# EAGLE board team throttle control draft 2 (EAGLE 9.6.2)
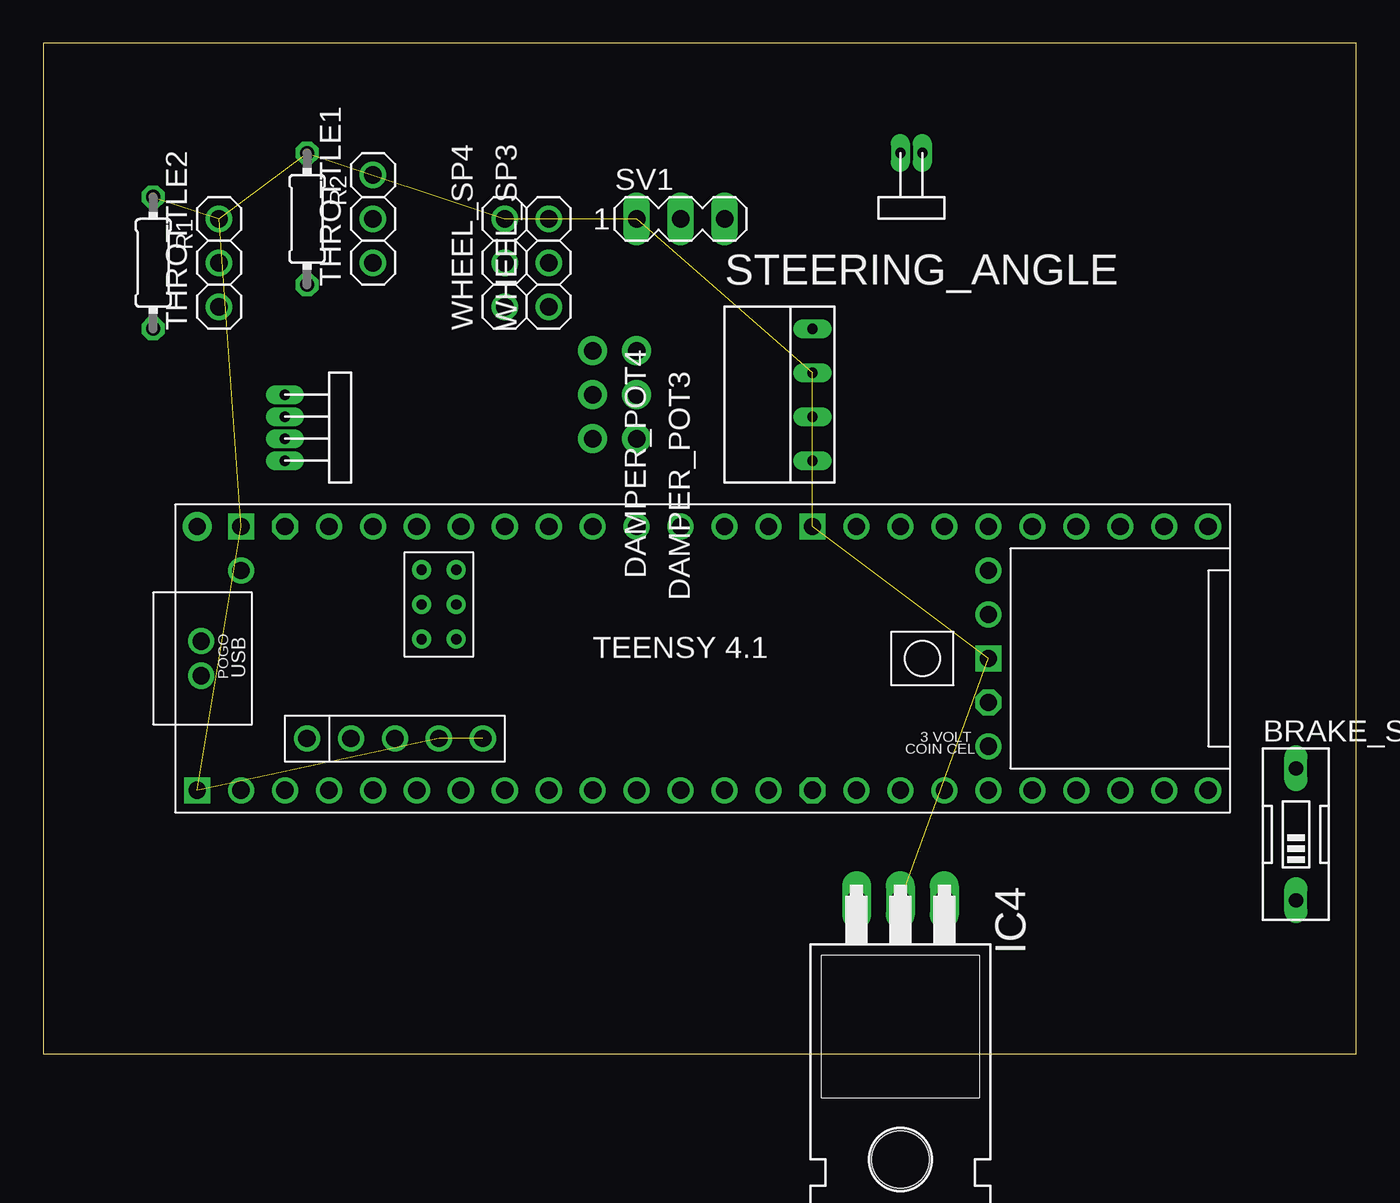
[diagram p0: board, top side]
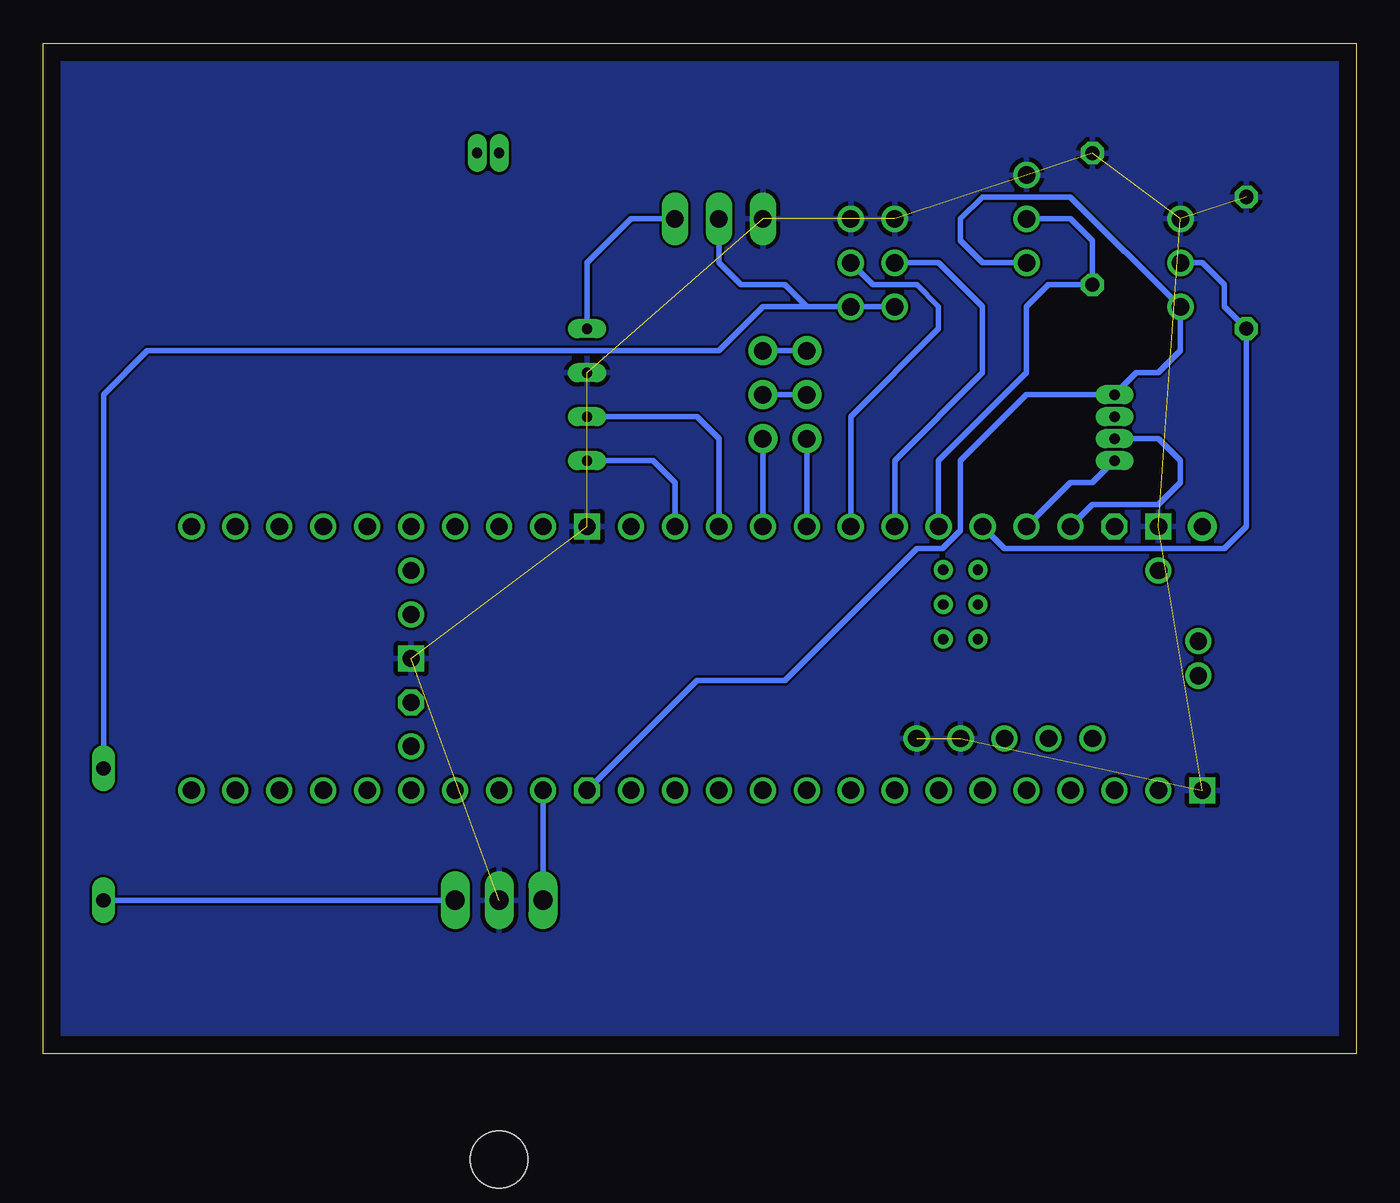
[diagram p1: board, bottom side, seen from below]

Size 75.87 x 58.41 mm. Coordinates in mm from the lower left corner, seen from the top.
Outline: 0,0 75.87,0 75.87,58.41 0,58.41 0,0
Copper layers (1*16): Top 0.035mm / dielectric 1.5mm / Bottom 0.035mm
Design rules "default": minimum track width 6mil, minimum drill 0.35mm, track to track 6mil, track to pad 6mil, pad to pad 6mil, via to via 6mil, smd to smd 6mil, copper to edge 40mil, drill to drill 6mil, minimum pad ring 10mil, minimum via ring 8mil, stop-mask expansion 4mil, vias tented up to drill 0mil, thermal gap 10mil

## Footprints (pad centres in the part's own frame; a part is rotated, then mirrored left to right if it is on the bottom)
EDG-01 = drill 0.813 long: 1 0,-3.81; 2 0,3.81
1X03-CLEANBIG = drill 1.016 pad 1.676: 1 -2.54,0; 2 0,0; 3 2.54,0
TO220H = drill 1.118 long: 1 -2.54,-10.16; 2 0,-10.16; 3 2.54,-10.16 | hole 3.302: 0,4.826
0204/7 = drill 0.813 octagon: 1 -3.81,0; 2 3.81,0
ROTARY_ENCODER = drill 0.6 long: GND 1.27,1.27; PH_A 1.27,-3.81; PH_B 1.27,-1.27; VCC 1.27,3.81
MA03-1 = drill 1.016 long: 1 -2.54,0; 2 0,0; 3 2.54,0
1X03 = drill 1.016: 1 -2.54,0; 2 0,0; 3 2.54,0
TEENSY41 = drill 1: 0-RX1/CS1/CRX2 -27.94,-7.62; 1-TX1/MISO1/CTX2 -25.4,-7.62; 2-OUT2 -22.86,-7.62; 3-LRCLK2 -20.32,-7.62; 4-BCLK2 -17.78,-7.62; 5-IN2 -15.24,-7.62; 6-OUT1D -12.7,-7.62; 7-RX2/OUT1A -10.16,-7.62; 8-TX2/IN2 -7.62,-7.62; 9-OUT1C -5.08,-7.62; 10-CS\MQSR -2.54,-7.62; 11-MOSI/CTX1 0,-7.62; 12-MISO/MQSL 2.54,-7.62; 13-SCK/LED 2.54,7.62; 14-A0/TX3/SPDIF_OUT 0,7.62; 15-A1/RX3/SPDIF_IN -2.54,7.62; 16-A2/RX4/SCL1 -5.08,7.62; 17-A3/TX4/SDA1 -7.62,7.62; 18-A4/SDA0 -10.16,7.62; 19-A5/SCL0 -12.7,7.62; 20-A6/TX5/LRCLK1 -15.24,7.62; 21-A7/RX5/BCLK1 -17.78,7.62; 22-A8/CTX1 -20.32,7.62; 23-A9/CRX1/MCLK1 -22.86,7.62; 24-A10/TX6/SCL2 7.62,-7.62; 25-A11/RX6/SDA2 10.16,-7.62; 26-A12/MOSI1 12.7,-7.62; 27-A13/SCK1 15.24,-7.62; 28-RX7 17.78,-7.62; 29-TX7 20.32,-7.62; 30-CRX3 22.86,-7.62; 31-CTX3 25.4,-7.62; 32-OUT1B 27.94,-7.62; 33-MCLK2 27.94,7.62; 34-RX8 25.4,7.62; 35-TX8 22.86,7.62; 36-PWM 20.32,7.62; 37-PWM 17.78,7.62; 38-A14/CS/IN1 15.24,7.62; 39-A15/CS/OUT1A 12.7,7.62; 40-A16/CS1 10.16,7.62; 41-A17/MISO1 7.62,7.62; +5V -24.13,-4.62; D+ -30.25,-1; D- -30.25,1; DM -21.59,-4.62; DP -19.05,-4.62; GND4 -16.51,-4.62; GND5 -13.97,-4.62; ON/OFF 15.24,5.08; PROGRAM 15.24,2.54; VBAT 15.24,-5.08; VUSB -27.94,5.08 | drill 1 octagon: 3V3-1 5.08,-7.62; 3V3-2 15.24,-2.54; 3V3-3 -25.4,7.62 | drill 0.6: G -15.51,3.12; LED -17.51,3.12; R+ -17.51,5.12; R- -15.51,5.12; T+ -15.51,1.12; T- -17.51,1.12 | drill 1 square: GND1 -30.48,-7.62; GND2 15.24,0; GND3 5.08,7.62; GND6 -27.94,7.62 | drill 1 pad 1.676: VIN -30.48,7.62
CAN_BUS = drill 0.6 long: P$2 3.81,2.54; P$3 5.08,2.54
CAN_TEN = drill 0.6 long: P$1 2.54,1.27; P$2 3.81,1.27; P$3 5.08,1.27; P$4 6.35,1.27

## Placement (x,y rotation side)
BRAKE_SW  [EDG-01]  72.39,12.7 0 top
DAMPER_POT3  [1X03-CLEANBIG]  34.29,38.1 270 top
DAMPER_POT4  [1X03-CLEANBIG]  31.75,38.1 270 top
IC4  7805T  [TO220H]  49.53,-1.27 180 top
R1  47k  [0204/7]  6.35,45.72 270 top
R2  470k  [0204/7]  15.24,48.26 270 top
STEERING_ANGLE  ROTARY_ENCODER  [ROTARY_ENCODER]  43.18,38.1 0 top
SV1  [MA03-1]  36.83,48.26 0 top
THROTTLE1  [1X03]  19.05,48.26 90 top
THROTTLE2  [1X03]  10.16,45.72 90 top
U$3  TEENSY41  [TEENSY41]  39.37,22.86 0 top
U$10  CAN_BUS  [CAN_BUS]  54.61,54.61 180 top
U$11  CAN_TEE  [CAN_TEN]  12.7,40.64 270 top
WHEEL_SP3  [1X03]  29.21,45.72 90 top
WHEEL_SP4  [1X03]  26.67,45.72 90 top

## Library data of the parts
BRAKE_SW = special
DAMPER_POT3 DAMPER_POT4 IC4 THROTTLE1 THROTTLE2 WHEEL_SP3 WHEEL_SP4 = adafruit
R1 R2 = rcl; SPICEPREFIX: R
STEERING_ANGLE U$10 U$11 = F-E library custom components
SV1 = con-lstb; OC_FARNELL: unknown; OC_NEWARK: unknown
U$3 = teensy

## Nets
3.3V: THROTTLE1.1 THROTTLE2.1 U$3.3V3-1 U$11.P$1
5V: STEERING_ANGLE.VCC SV1.3
12V: BRAKE_SW.2 SV1.2 WHEEL_SP3.1 WHEEL_SP4.1
A2_2: DAMPER_POT3.3 U$3.16-A2/RX4/SCL1
A3_2: DAMPER_POT4.3 U$3.17-A3/TX4/SDA1
ACC_DATA_OUT_1: R2.2 THROTTLE1.2 U$3.20-A6/TX5/LRCLK1
ACC_DATA_OUT_2: R1.2 THROTTLE2.2 U$3.21-A7/RX5/BCLK1
BL_GND: DAMPER_POT3.2 DAMPER_POT4.2
BR_SW: IC4.3 U$3.24-A10/TX6/SCL2
BR_VCC: DAMPER_POT3.1 DAMPER_POT4.1
CRX_2: U$3.23-A9/CRX1/MCLK1 U$11.P$3
CTX_2: U$3.22-A8/CTX1 U$11.P$4
GND: IC4.2 R1.1 R2.1 STEERING_ANGLE.GND SV1.1 THROTTLE1.3 THROTTLE2.3 U$3.GND1 U$3.GND2 U$3.GND3 U$3.GND4 U$3.GND5 U$3.GND6 WHEEL_SP3.3 WHEEL_SP4.3
GND\: U$11.P$2
N$4: BRAKE_SW.1 IC4.1
T2_DP_1: STEERING_ANGLE.PH_A U$3.14-A0/TX3/SPDIF_OUT
T2_DP_2: STEERING_ANGLE.PH_B U$3.15-A1/RX3/SPDIF_IN
WH_SP3_D: U$3.18-A4/SDA0 WHEEL_SP3.2
WH_SP4_D: U$3.19-A5/SCL0 WHEEL_SP4.2

## Tracks (layer width: path | path; a pad name or v marks a point on that pad's centre or on a via)
3.3V
  Bottom 0.305: THROTTLE1.1 21.59,45.72 22.86,46.99 22.86,48.26 21.59,49.53 16.51,49.53 THROTTLE2.1 10.16,40.64 11.43,39.37 12.7,39.37 U$11.P$1 19.05,38.1 22.86,34.29 22.86,30.25 23.9,29.21 25.4,29.21 33.02,21.59 38.1,21.59 U$3.3V3-1
5V
  Bottom 0.305: STEERING_ANGLE.VCC 44.45,45.72 41.91,48.26 SV1.3
12V
  Bottom 0.305: WHEEL_SP4.1 WHEEL_SP3.1 31.75,43.18 | 31.75,43.18 34.29,43.18 36.83,40.64 69.85,40.64 72.39,38.1 BRAKE_SW.2 | 31.75,43.18 33.02,44.45 35.56,44.45 36.83,45.72 SV1.2
A2_2
  Bottom 0.305: DAMPER_POT3.3 U$3.16-A2/RX4/SCL1
A3_2
  Bottom 0.305: DAMPER_POT4.3 U$3.17-A3/TX4/SDA1
ACC_DATA_OUT_1
  Bottom 0.305: U$3.20-A6/TX5/LRCLK1 24.13,34.29 19.05,39.37 19.05,43.18 17.78,44.45 R2.2 15.24,46.99 16.51,48.26 THROTTLE1.2
ACC_DATA_OUT_2
  Bottom 0.305: THROTTLE2.2 8.89,45.72 7.62,44.45 7.62,43.18 R1.2 6.35,30.48 7.62,29.21 20.32,29.21 U$3.21-A7/RX5/BCLK1
BL_GND
  Bottom 0.305: DAMPER_POT4.2 DAMPER_POT3.2
BR_SW
  Bottom 0.305: IC4.3 U$3.24-A10/TX6/SCL2
BR_VCC
  Bottom 0.305: DAMPER_POT4.1 DAMPER_POT3.1
CRX_2
  Bottom 0.305: U$3.23-A9/CRX1/MCLK1 15.24,31.75 11.43,31.75 10.16,33.02 10.16,34.29 11.43,35.56 U$11.P$3
CTX_2
  Bottom 0.305: U$3.22-A8/CTX1 16.51,33.02 15.24,33.02 U$11.P$4
GND  (14 unrouted)
  pour Bottom: 0,58.42 76.2,58.42 76.2,0 0,0
N$4
  Bottom 0.305: IC4.1 BRAKE_SW.1
T2_DP_1
  Bottom 0.305: STEERING_ANGLE.PH_A 40.64,34.29 39.37,33.02 U$3.14-A0/TX3/SPDIF_OUT
T2_DP_2
  Bottom 0.305: STEERING_ANGLE.PH_B 38.1,36.83 36.83,35.56 U$3.15-A1/RX3/SPDIF_IN
WH_SP3_D
  Bottom 0.305: WHEEL_SP3.2 27.94,44.45 25.4,44.45 24.13,43.18 24.13,41.91 29.21,36.83 U$3.18-A4/SDA0
WH_SP4_D
  Bottom 0.305: U$3.19-A5/SCL0 26.67,34.29 21.59,39.37 21.59,43.18 24.13,45.72 WHEEL_SP4.2